# Altium PCB SolarPanelXPlus2.PcbDoc
Units mm, origin at the board's own origin, x right, y up, seen from the top; angles counter-clockwise.
Board outline 277.5 x 83 mm, 2 copper layers (Top Layer, Bottom Layer); 24 components, 17 nets, 106 pads, 11 vias.
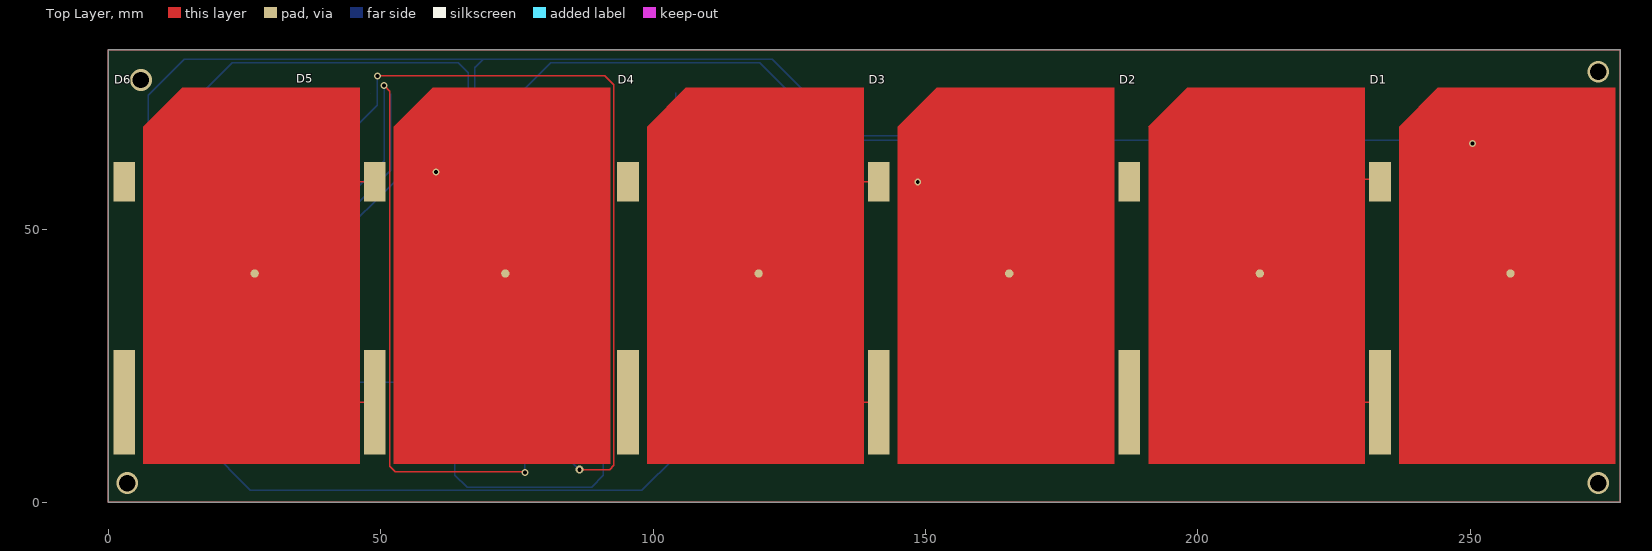
[diagram p0: Top Layer view]
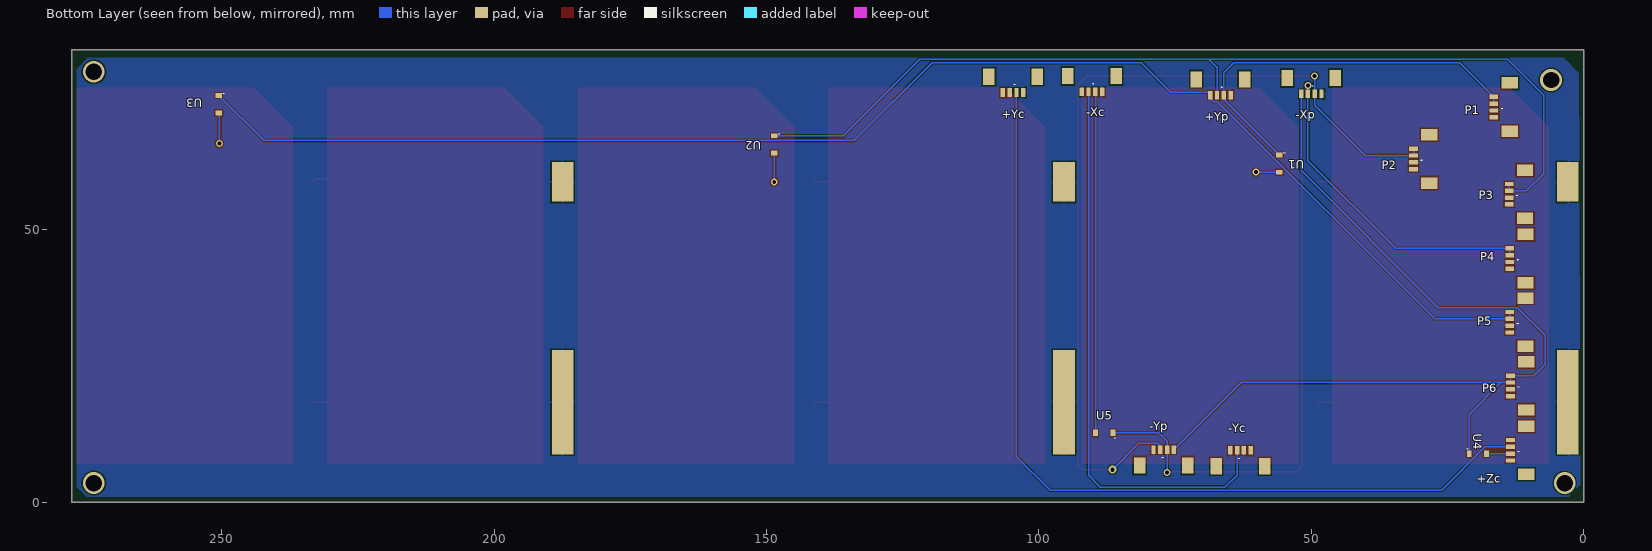
[diagram p1: Bottom Layer view, seen from below]

## Layer stack, top to bottom
Top Solder: solder mask 0.0102, Solder Resist, Dk 3.5
Top Layer: signal copper 0.0356
Dielectric 1: dielectric 0.32, FR-4, Dk 4.8
Bottom Layer: signal copper 0.0356
Bottom Solder: solder mask 0.0102, Solder Resist, Dk 3.5

## Board outline
0,0 277.5,0 277.5,83 0,83

## Design rules (kind name [scope] priority, off if disabled: settings)
Clearance [All] p1: gap=0.254 ignorepadtopadclearanceinfootprint=FALSE except(0: Arc-Hole Track-Hole SMDPad-Hole THPad-Hole Via-Hole Fill-Hole Poly-Hole Region-Hole Text-Hole)
PolygonConnect [All] p1: connectstyle=Relief reliefconductorwidth=0.254 reliefentries=4 polygonreliefangle="90 Angle" airgapwidth=0.254
RoutingVias [All] p1: holewidth=0.711 width=1.27 viastyle="Through Hole" minholewidth=0.711 minwidth=1.27 maxholewidth=0.711 maxwidth=1.27
SolderMaskExpansion [All] p1: expansion=0.102
Width [All] p1: maxlimit=0.254 minlimit=0.254 preferedwidth=0.254
30 further rules are at their usual default settings.

## Components (designator, comment, footprint, x,y, rotation, side; value= is the part's Value field where it differs from the comment)
+Yc "Connector 4POS Molex PicoBlade" 532610471 106.64,75.184 r270 bottom
+Yp "Connector 4POS Molex PicoBlade" 532610471 68.57,74.697 r270 bottom
+Zc "Connector 4POS Molex PicoBlade" 532610471 13.462,11.41 r0 bottom
-Xc "Connector 4POS Molex PicoBlade" 532610471 92.152,75.332 r270 bottom
-Xp "Connector 4POS Molex PicoBlade" 532610471 51.893,74.951 r270 bottom
-Yc "Connector 4POS Molex PicoBlade" 532610471 61.137,9.504 r90 bottom
-Yp "Connector 4POS Molex PicoBlade" 532610471 75.234,9.631 r90 bottom
D1 "Solar Cell" SolAeroBJT#1 237,7 r90 top
D2 "Solar Cell" SolAeroBJT#2 191,7 r90 top
D3 "Solar Cell" SolAeroBJT#1 145,7 r90 top
D4 "Solar Cell" SolAeroBJT#2 99,7 r90 top
D5 "Solar Cell" SolAeroBJT#1 52.5,7 r90 top
D6 "Solar Cell" SolAeroBJT#2 6.5,7 r90 top
P1 "Connector 4POS Molex PicoBlade" 532610471 16.51,74.402 r0 bottom
P2 "Connector 4POS Molex PicoBlade" 532610471 31.242,64.877 r0 bottom
P3 "Connector 4POS Molex PicoBlade" 532610471 13.695,58.41 r0 bottom
P4 "Connector 4POS Molex PicoBlade" 532610471 13.589,46.589 r0 bottom
P5 "Connector 4POS Molex PicoBlade" 532610471 13.589,34.905 r0 bottom
P6 "Connector 4POS Molex PicoBlade" 532610471 13.462,23.221 r0 bottom
U1 "MBR0520LT1G" SOD-123 55.88,62.154 r270 bottom value=Value
U2 "MBR0520LT1G" SOD-123 148.59,65.659 r270 bottom value=Value
U3 "MBR0520LT1G" SOD-123 250.571,73.025 r270 bottom value=Value
U4 "MBR0520LT1G" SOD-123 19.431,8.89 r180 bottom value=Value
U5 "MBR0520LT1G" SOD-123 88.011,12.7 r0 bottom value=Value

## Footprints (in the part's own frame and the unit in brackets; to place one, negate y for a bottom-side part, rotate by r counter-clockwise, add the part's x,y. Pads: shape width x height; smd on the part's side, far side on the other; paste and mask are expansions set on the pad)
532610471 [mm] "Connector 4POS Molex PicoBlade"
  rect 1.6x0.8 smd: 1(0,3.75) 2(0,2.5) 3(0,1.25) 4(0,0)
  rect 3x2.1 smd: ""(-2.9,-2.55) ""(-2.9,6.3)
  silkscreen extent -1.52,2.07 -1.42,2.17, body extent -4.71,-3.81 1.02,7.56, height 0.6
SOD-123 [mm] "SODFL, 2-Leads, Body 1.60x3.75mm, IPC Medium Density"
  rect 0.9x1.2 smd: 1(-1.6,0) 2(1.6,0)
  silkscreen extent -2,0.85 -1.9,0.95, body extent -1.4,-0.9 1.4,0.9, height 1.35
SolAeroBJT#1 [mm] "Solar Cell"
  round 1.524 smd: 1(34.975,-20.388)
  rect 19.16x4 smd: 2(11.36,3.57)
  rect 7.26x4 smd: 2(51.78,3.57)
  Top Layer region: 69.066,-7.058 69.066,-7.053 61.956,0.057 61.942,0.043 0.043,0.043 0.043,-39.639 69.066,-39.639
SolAeroBJT#2 [mm] "Solar Cell"
  round 1.524 smd: 1(34.975,-20.388)
  rect 19.16x4 all layers, no hole: 2(11.36,3.57)
  rect 7.26x4 all layers, no hole: 2(51.78,3.57)
  Top Layer region: 69.066,-7.058 69.066,-7.053 61.956,0.057 61.942,0.043 0.043,0.043 0.043,-39.639 69.066,-39.639

## Part data
+Yc +Yp +Zc -Xc -Xp -Yc -Yp P1 P2 P3 P4 P5 P6: library part 532610471
D1 D2 D3 D4 D5 D6: library part SolAeroBJT1, "SolAero BJT Space Solar Cell"
U1 U2 U3 U4 U5: "Imported", C="Copyright (C) 2015 Accelerated Designs. All rights reserved", Copyright="Copyright (C) 2015 Accelerated Designs. All rights reserved", Manufacturer_Part_Number=MBR0520LT1G, RefDes=RefDes, Type=Type, Vendor="ON Semiconductor"

## Via types
v1: diameter 1.27, hole 0.711, Top Layer to Bottom Layer, 6 vias
v2: diameter 4, hole 3, Top Layer to Bottom Layer, 4 vias
v3: diameter 1.5, hole 0.78, Top Layer to Bottom Layer, 1 vias

## Nets (pads, with @x,y where several pads share a name; then routed paths per layer and width w, separated by ;. In a path a pad name is that pad's centre, name@x,y a point inside that pad or via, vN(x,y) a via of type N, cw(c..) or ccw(c..) an arc to the next point about the centre after c; other vN are vias at no path point)
"C1 D IN": +Zc.2 U4.2 | length 4.4
  Bottom Layer w0.254: +Zc.2 13.482,8.89 U4.2
"C1 LH": +Yc.2 +Zc.3 | length 163.3
  Bottom Layer w0.254: +Zc.3 18.161,10.16 26.111,2.21 97.968,2.21 104.14,8.382 +Yc.2
"C2 D IN": -Xc.2 U5.2 | length 62.6
  Bottom Layer w0.254: U5.2 89.611,75.291 -Xc.2
"C2 LH": -Xc.3 -Yc.2 | length 104.1
  Bottom Layer w0.254: -Yc.2 63.637,4.943 65.786,2.794 65.786,2.769 88.773,2.769 90.902,4.898 -Xc.3
GND: +Yc.1 +Yc.3 +Yp.1 +Zc.1 -Xc.1 -Xp.1 -Yc.1 -Yc.3 -Yp.1 D2.2 D4.2 D6.2 P1.1 P1.2 P2.1 P2.2 P3.1 P3.2 P4.1 P4.2 P5.1 P5.2 P6.1 P6.2 | length 18.5
  Top Layer w0.254: D4.2@95.43,12.319 D4.2@95.43,18.36
  Bottom Layer w0.254: D6.2@2.93,10.77 2.93,18.36 D6.2@2.93,22.835 ; -Xp.1 -Xp.1@48.143,74.955 ; +Yp.1@64.82,74.295 +Yp.1
"P1 PV C1": D5.2 D6.1 | length 65.9
  Top Layer w0.254: D6.1 27.686,42.773 ; D5.2@48.93,18.36 42.617,18.36 42.617,27.842 27.686,42.773 ; D5.2@48.93,58.78 43.693,58.78 27.686,42.773
"P1 PV C2": D5.1 U1.2 | length 29
  Top Layer w0.254: v1(60.198,60.579) 61.595,60.579 72.888,49.286 D5.1
  Bottom Layer w0.254: U1.2 60.173,60.554 v1(60.198,60.579)
"P1 VSC 1": +Yp.2 P1.3 P1.4 U1.1 | length 73.4
  Bottom Layer w0.254: P1.3 P1.4 22.753,80.645 64.262,80.645 66.07,78.837 +Yp.2 66.07,73.944 U1.1
"P1 VSC 2": -Xp.2 -Yp.2 P2.3 P2.4 | length 160.9
  Top Layer w0.254: v1(49.403,78.232) 91.186,78.232 92.837,76.581 92.837,6.731 92.075,5.969 v3(86.487,5.969)
  Bottom Layer w0.254: P2.4 P2.3 40.147,63.627 49.393,72.873 -Xp.2 49.393,78.222 v1(49.403,78.232) ; -Yp.2 77.734,10.343 78.203,10.812 81.644,10.812 v3(86.487,5.969)
"P2 PV C1": D3.2 D4.1 | length 65.5
  Top Layer w0.254: D3.2@141.43,18.36 135.073,18.36 119.388,34.045 D4.1 136.193,58.78 D3.2@141.43,58.78
"P2 PV C2": D3.1 U2.2 | length 29
  Top Layer w0.254: v1(148.59,58.773) D3.1
  Bottom Layer w0.254: v1(148.59,58.773) U2.2
"P2 VSC 1": +Yp.3 P3.3 P3.4 U2.1 | length 180.4
  Bottom Layer w0.254: P3.4 P3.3 10.531,57.16 7.366,60.325 7.366,74.676 13.995,81.305 68.844,81.305 ; +Yp.3 67.32,79.781 ; 67.32,79.902 67.32,79.781 ; U2.1 135.941,67.259 121.895,81.305 68.844,81.305 ; 67.32,79.781 68.844,81.305
"P2 VSC 2": -Xp.3 -Yp.3 P4.3 P4.4 U5.1 | length 170.7
  Top Layer w0.254: v1(50.648,76.505) 51.714,75.438 51.714,6.579 52.705,5.588 76.332,5.588 v1(76.484,5.436)
  Bottom Layer w0.254: P4.3 P4.4 34.524,46.589 50.643,62.708 -Xp.3 50.643,76.5 v1(50.648,76.505) ; v1(76.484,5.436) -Yp.3 76.484,11.206 77.978,12.7 U5.1
"P3 PV C1": D1.2 D2.1 | length 70.5
  Top Layer w0.254: D2.1 211.388,40.386 ; D1.2@233.43,18.36 220.4,18.36 211.388,27.372 211.388,40.386 ; D1.2@233.43,58.78 232.901,59.309 230.311,59.309 211.388,40.386
"P3 PV C2": D1.1 U3.2 | length 32.5
  Top Layer w0.254: v1(250.444,65.837) 250.444,48.919 D1.1
  Bottom Layer w0.254: v1(250.444,65.837) 250.444,71.425 U3.2
"P3 VSC 1": +Yp.4 P5.3 P5.4 U3.1 | length 267.7
  Bottom Layer w0.254: P5.4 P5.3 27.392,33.655 67.253,73.516 67.908,73.516 68.57,74.178 +Yp.4 68.57,75.26 75.819,75.26 81.255,80.696 119.583,80.696 133.883,66.396 242.342,66.396 U3.1
"P3 VSC 2": -Xp.4 -Yp.4 P6.3 P6.4 U4.1 | length 167.5
  Bottom Layer w0.254: U4.1 21.031,16.18 15.24,21.971 ; -Xp.4 51.893,60.91 26.67,35.687 12.192,35.687 7.112,30.607 7.112,25.273 9.164,23.221 P6.4 P6.3 15.24,21.971 ; -Yp.4 62.894,21.971 15.24,21.971
pads on no net: +Yc. +Yc.4 +Yp. +Zc. +Zc.4 -Xc. -Xc.4 -Xp. -Yc. -Yc.4 -Yp. P1. P2. P3. P4. P5. P6.
copper on no net: | length 721
  Top Layer w0.254: 0,0 277.5,0 277.5,83 0,83 0,0
  other v2: 3.5,3.5 273.5,3.5 6,77.5 273.5,79

## Polygon pours and split planes (outlines as drawn)
GND on Bottom Layer "Bottom Layer-GND" (solid, pour order 4): 0.889,78.74 3.683,81.534 274.574,81.534 276.606,79.502 276.606,2.794 274.828,1.016 2.794,1.016 0.635,3.175